# EAGLE board Plug_ATMega8 (EAGLE 5.10)
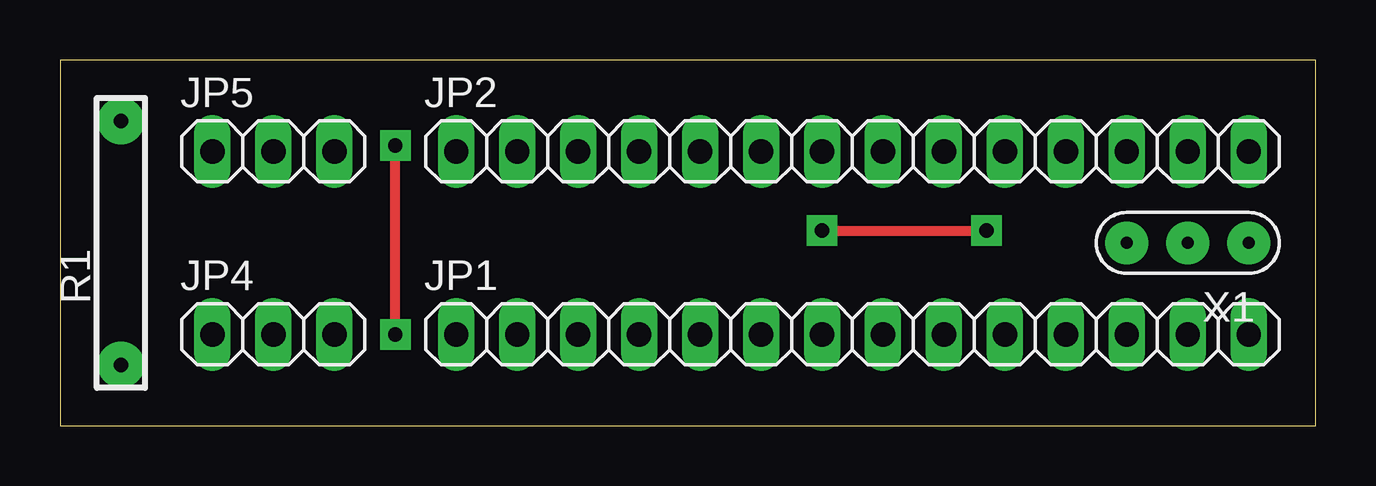
[diagram p0: board, top side]
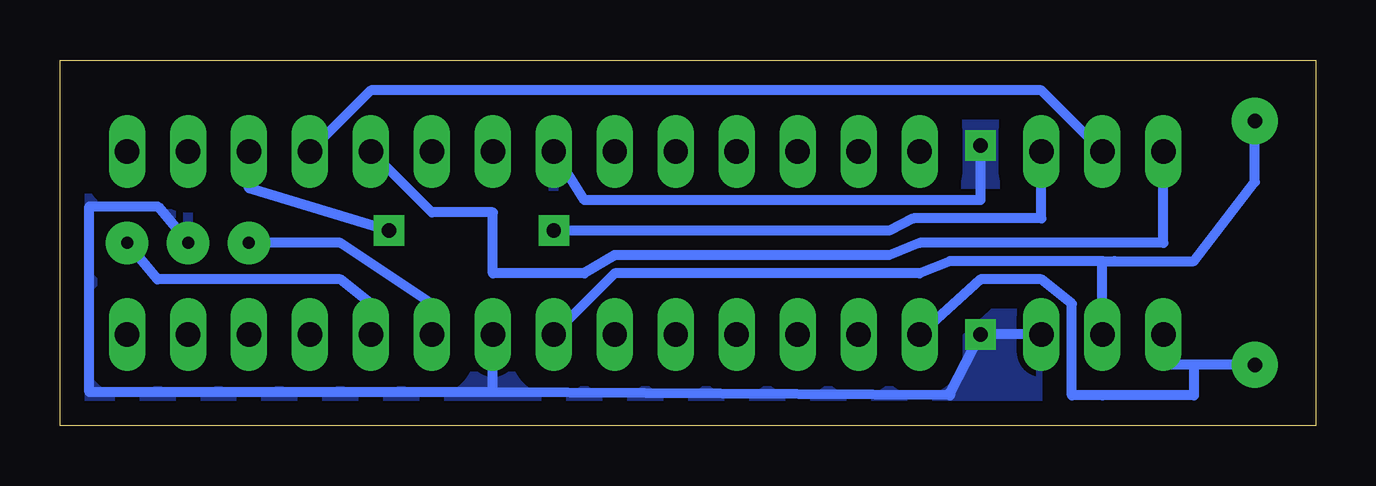
[diagram p1: board, bottom side, seen from below]

Size 52.32 x 15.24 mm. Coordinates in mm from the lower left corner, seen from the top.
Outline: 0,0 52.32,0 52.32,15.24 0,15.24 0,0
Copper layers (1*16): Top 0.035mm / dielectric 1.5mm / Bottom 0.035mm
Design rules "default": minimum track width 10mil, minimum drill 24mil, track to track 8mil, track to pad 8mil, pad to pad 8mil, via to via 8mil, smd to smd 8mil, copper to edge 40mil, drill to drill 8mil, minimum pad ring 10mil, minimum via ring 8mil, stop-mask expansion 4mil, vias tented up to drill 0mil, thermal gap 10mil

## Footprints (pad centres in the part's own frame; a part is rotated, then mirrored left to right if it is on the bottom)
1X14 = drill 1.016 long: 1 -16.51,0; 2 -13.97,0; 3 -11.43,0; 4 -8.89,0; 5 -6.35,0; 6 -3.81,0; 7 -1.27,0; 8 1.27,0; 9 3.81,0; 10 6.35,0; 11 8.89,0; 12 11.43,0; 13 13.97,0; 14 16.51,0
1X03 = drill 1.016 long: 1 -2.54,0; 2 0,0; 3 2.54,0
R_0.125W_4 = drill 0.6 pad 1.93 round: 1 -5.08,0; 2 5.08,0
CSTLS = drill 0.5 pad 1.778 round: 1 -2.54,0; 2 0,0; 3 2.54,0

## Placement (x,y rotation side)
JP1  [1X14]  33.02,3.81 0 top
JP2  [1X14]  33.02,11.43 0 top
JP4  [1X03]  8.89,3.81 0 top
JP5  [1X03]  8.89,11.43 0 top
R1  10K  [R_0.125W_4]  2.54,7.62 90 top
X1  16MHz  [CSTLS]  46.99,7.62 180 top

## Library data of the parts
JP1 JP2 JP4 JP5 = pinheader
R1 X1 = MyLib

## Nets
GND: JP1.8 JP2.7 JP4.3 X1.2
N$1: JP1.1 JP4.1 R1.1
N$2: JP2.12 JP5.3
N$3: JP2.11 JP5.2
N$4: JP2.10 JP5.1
N$6: JP1.9 X1.3
N$7: JP1.10 X1.1
VCC: JP1.7 JP4.2 R1.2

## Tracks (layer width: path | path; a pad name or v marks a point on that pad's centre or on a via)
GND  (via drill 0.6 pad 1.27)
  Top 0.406: v13.97,3.81 v13.97,11.68
  Bottom 0.406: JP4.3 v13.97,3.81 15.24,1.4 15.24,1.27 34.29,1.4 | 34.29,1.4 JP1.8 | X1.2 48.26,9.14 51.1,9.14 51.1,1.4 34.29,1.4 | JP2.7 30.48,9.4 13.97,9.4 v13.97,11.68
  pour Bottom (isolate 1.016): 0,15.24 0,0 52.07,0 52.07,15.24
N$1
  Bottom 0.406: JP1.1 13.97,6.1 11.43,6.1 10.16,5.08 10.16,1.27 8.89,1.27 5.08,1.27 5.08,2.54 | R1.1 5.08,2.54 | 5.08,2.54 6.35,2.54 JP4.1
N$2  (via drill 0.6 pad 1.27)
  Top 0.406: v31.75,8.13 v38.61,8.13
  Bottom 0.406: JP5.3 11.43,8.64 16.76,8.64 17.78,8.13 v31.75,8.13 | v38.61,8.13 44.45,9.91 JP2.12
N$3
  Bottom 0.406: JP5.2 11.43,13.97 39.37,13.97 JP2.11
N$4
  Bottom 0.406: JP5.1 6.35,7.62 16.51,7.62 17.78,7.11 29.21,7.11 30.48,6.35 34.29,6.35 34.29,8.89 36.83,8.89 JP2.10
N$6
  Bottom 0.406: JP1.9 36.83,5.08 40.64,7.62 X1.3
N$7
  Bottom 0.406: JP1.10 39.37,5.08 40.64,6.1 48.26,6.1 X1.1
VCC
  Bottom 0.406: JP4.2 8.89,6.86 | R1.2 2.54,10.16 5.08,6.86 8.38,6.86 8.89,6.86 | JP1.7 29.21,6.35 16.51,6.35 15.24,6.86 8.89,6.86